# Altium PCB motor_board.PcbDoc
Units mm, origin at the board's own origin, x right, y up, seen from the top; angles counter-clockwise.
Board outline 50 x 50 mm, 4 copper layers (TOP, GND1, GND2, BOTTOM), stack 0.603 mm thick; 61 components, 21 nets, 117 pads, 255 vias.
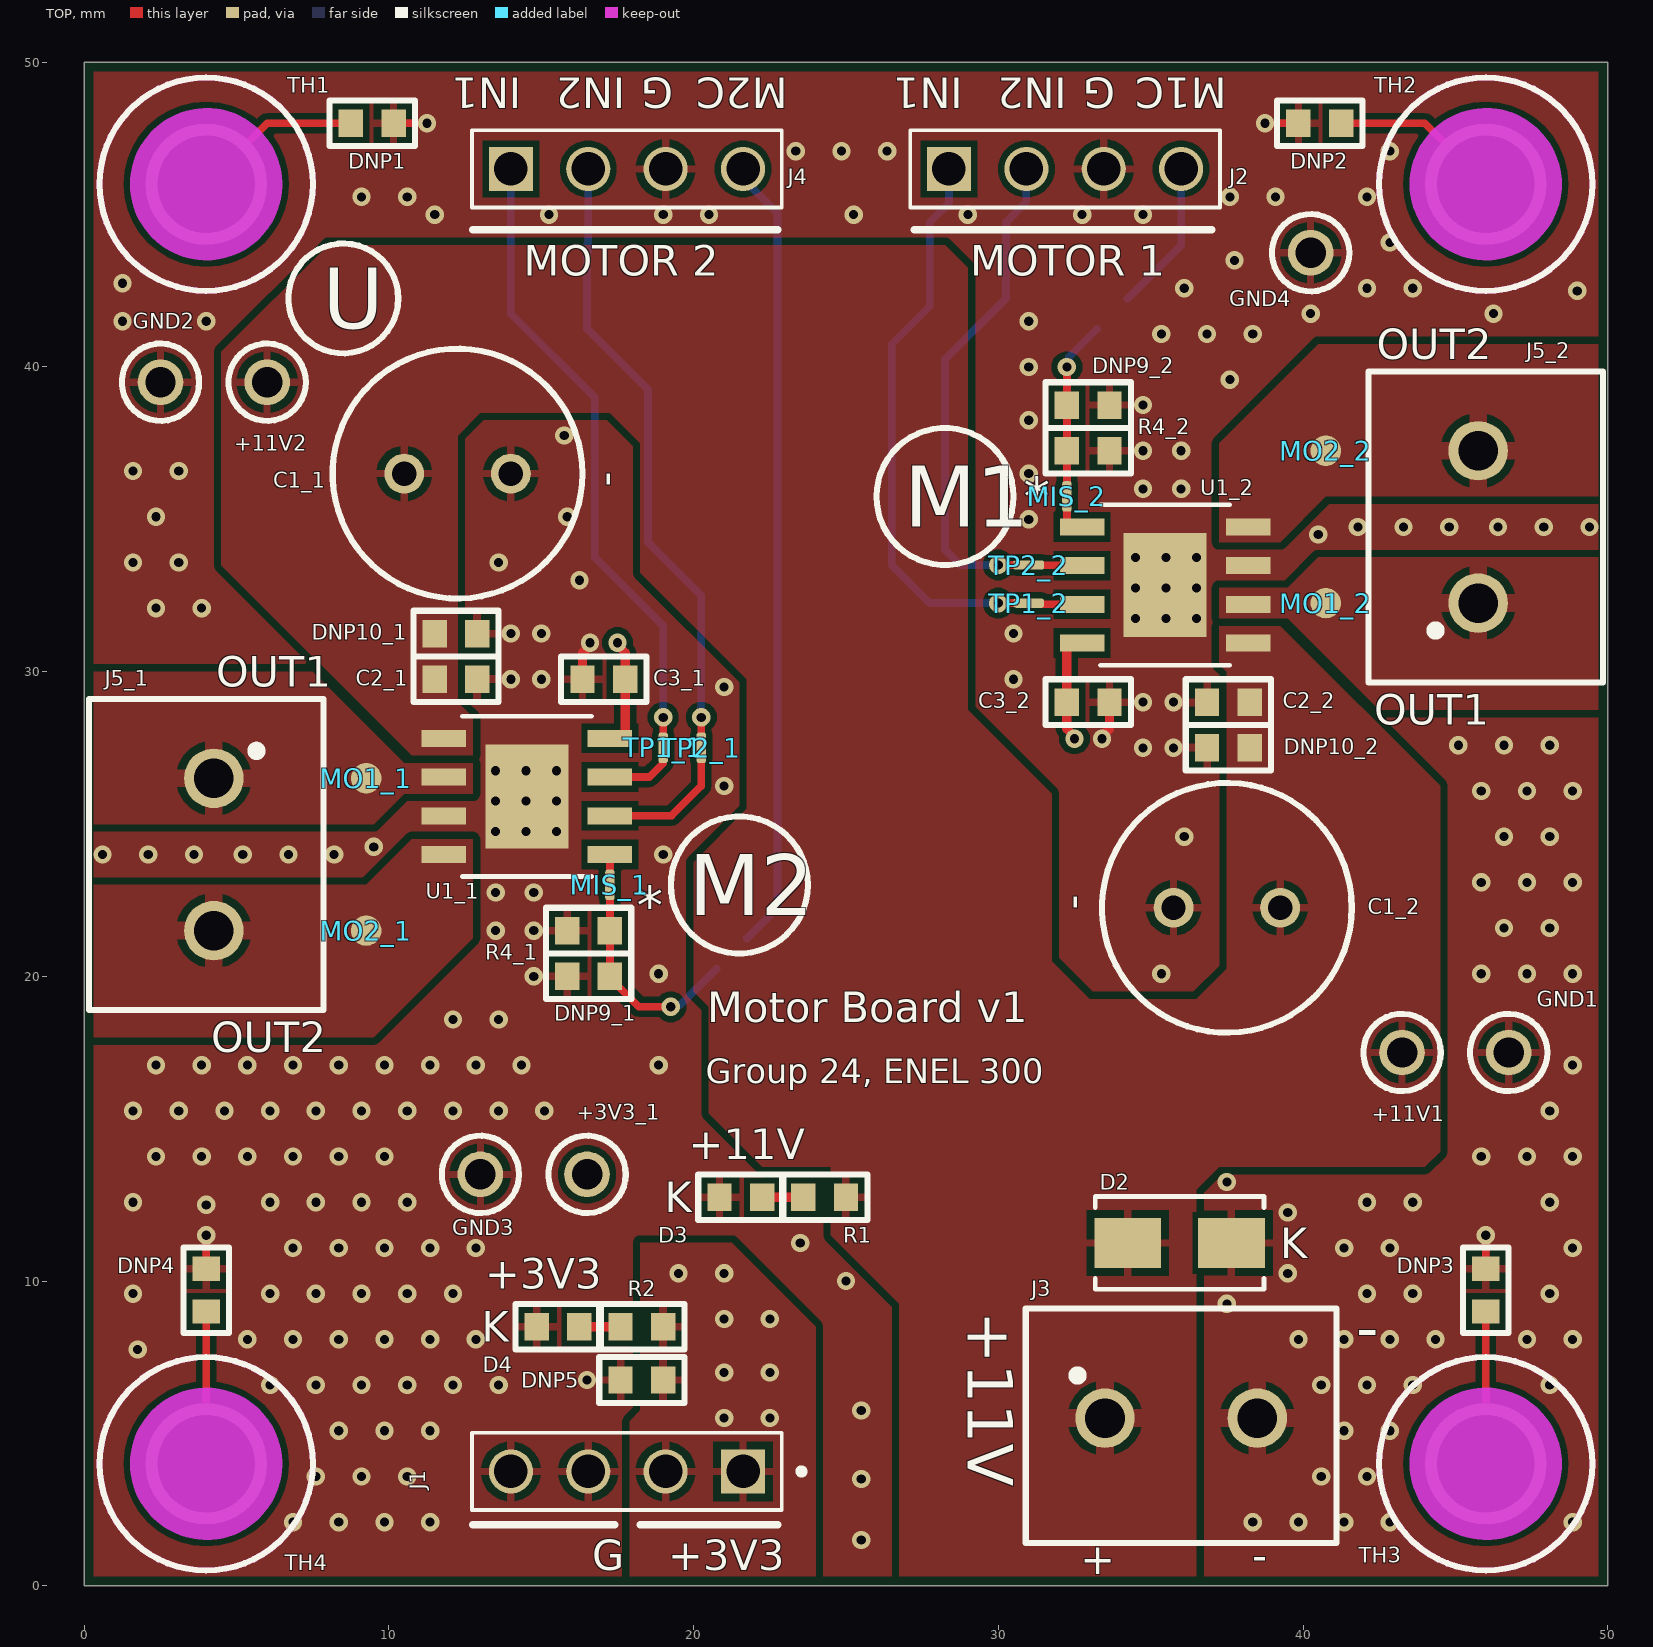
[diagram p0: TOP view]
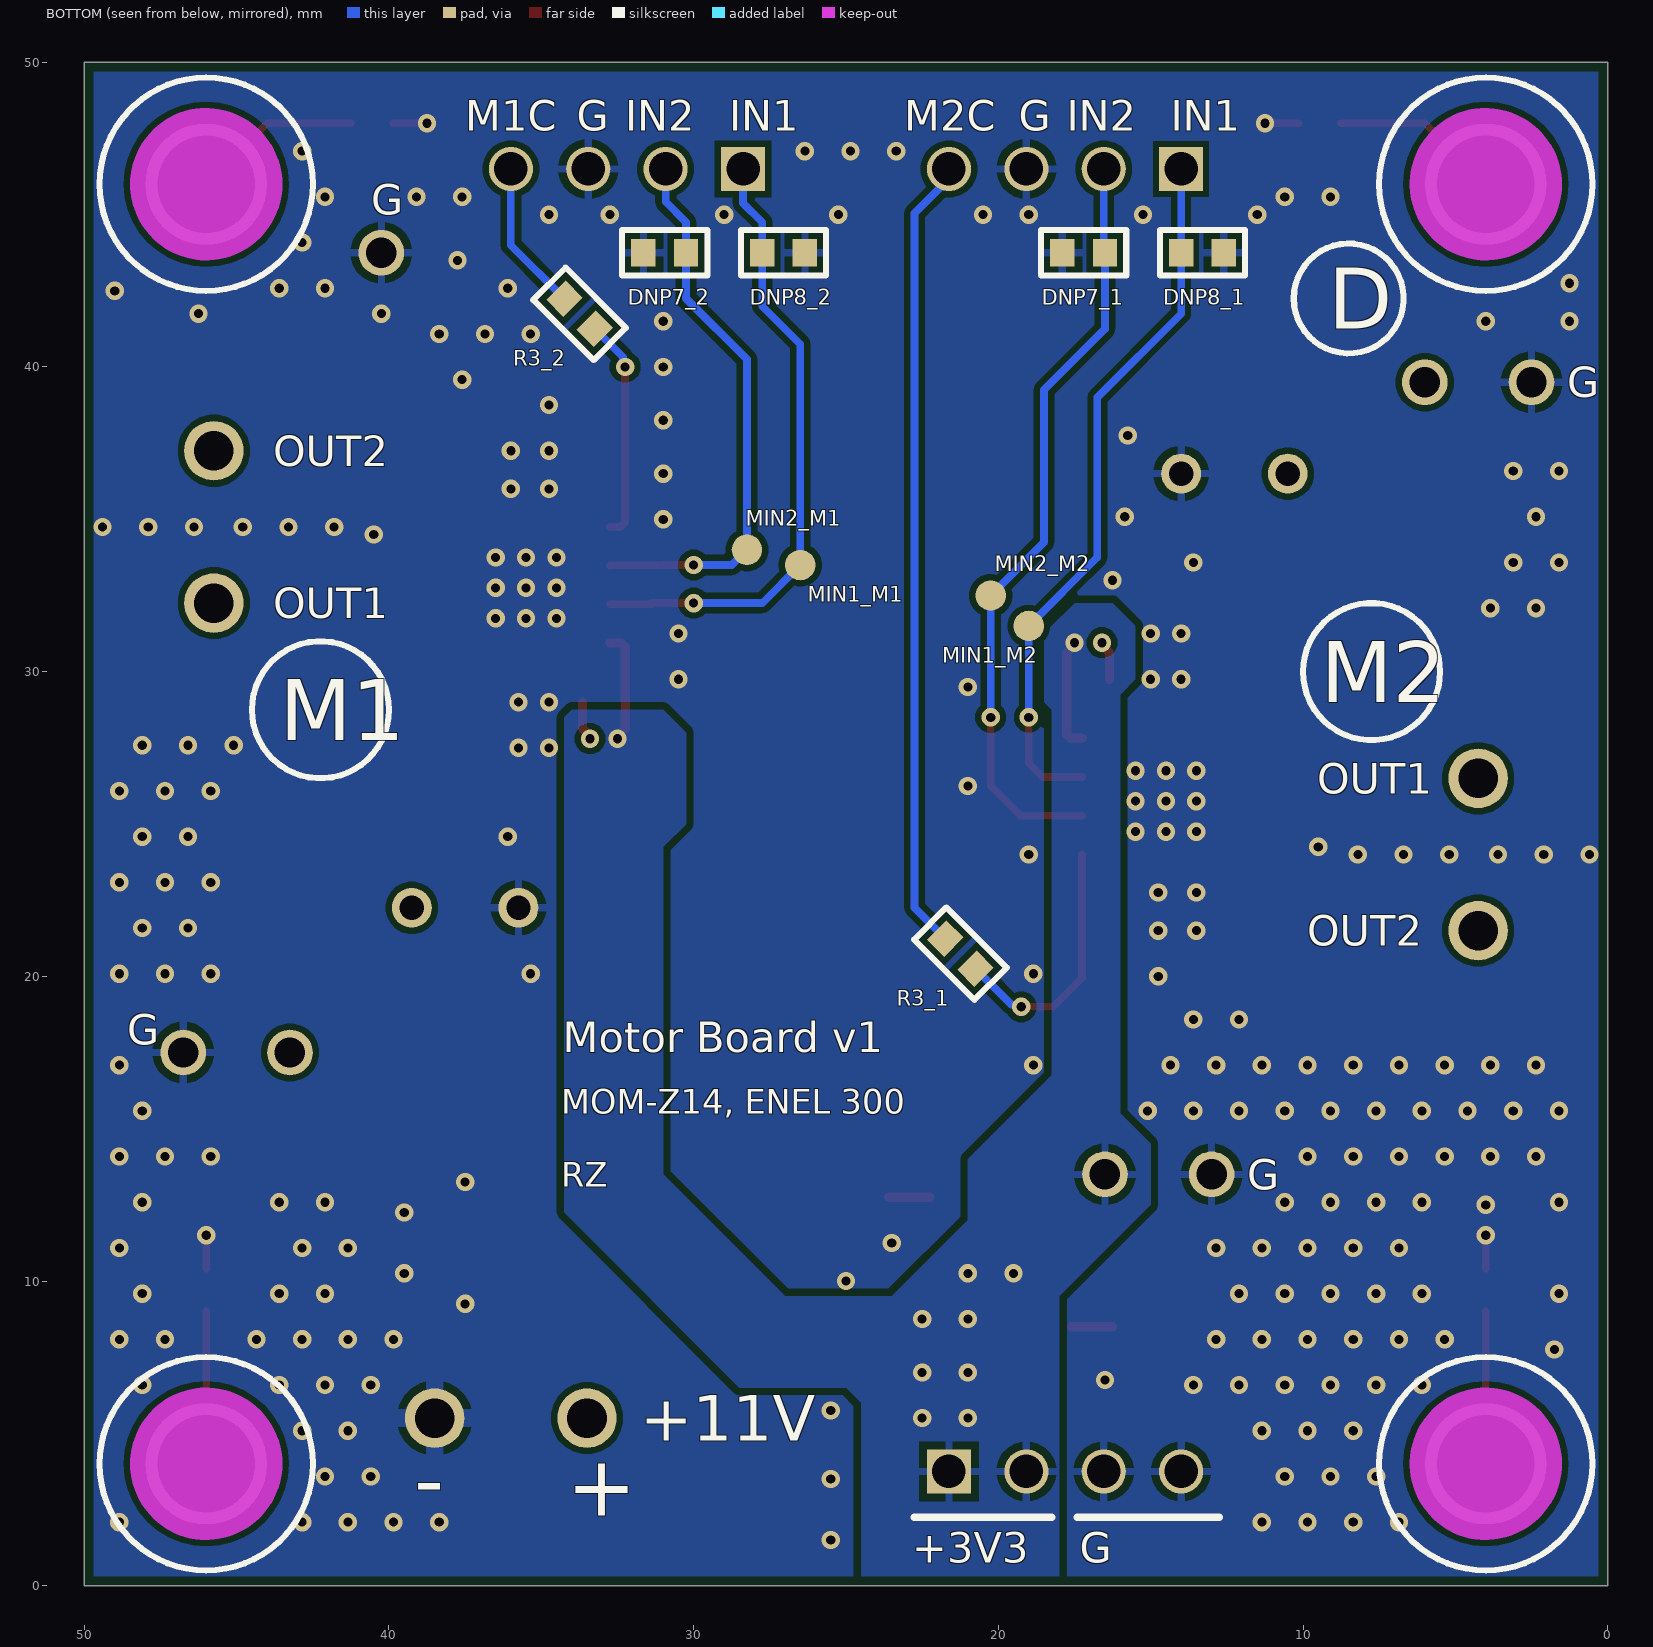
[diagram p1: BOTTOM view, seen from below]
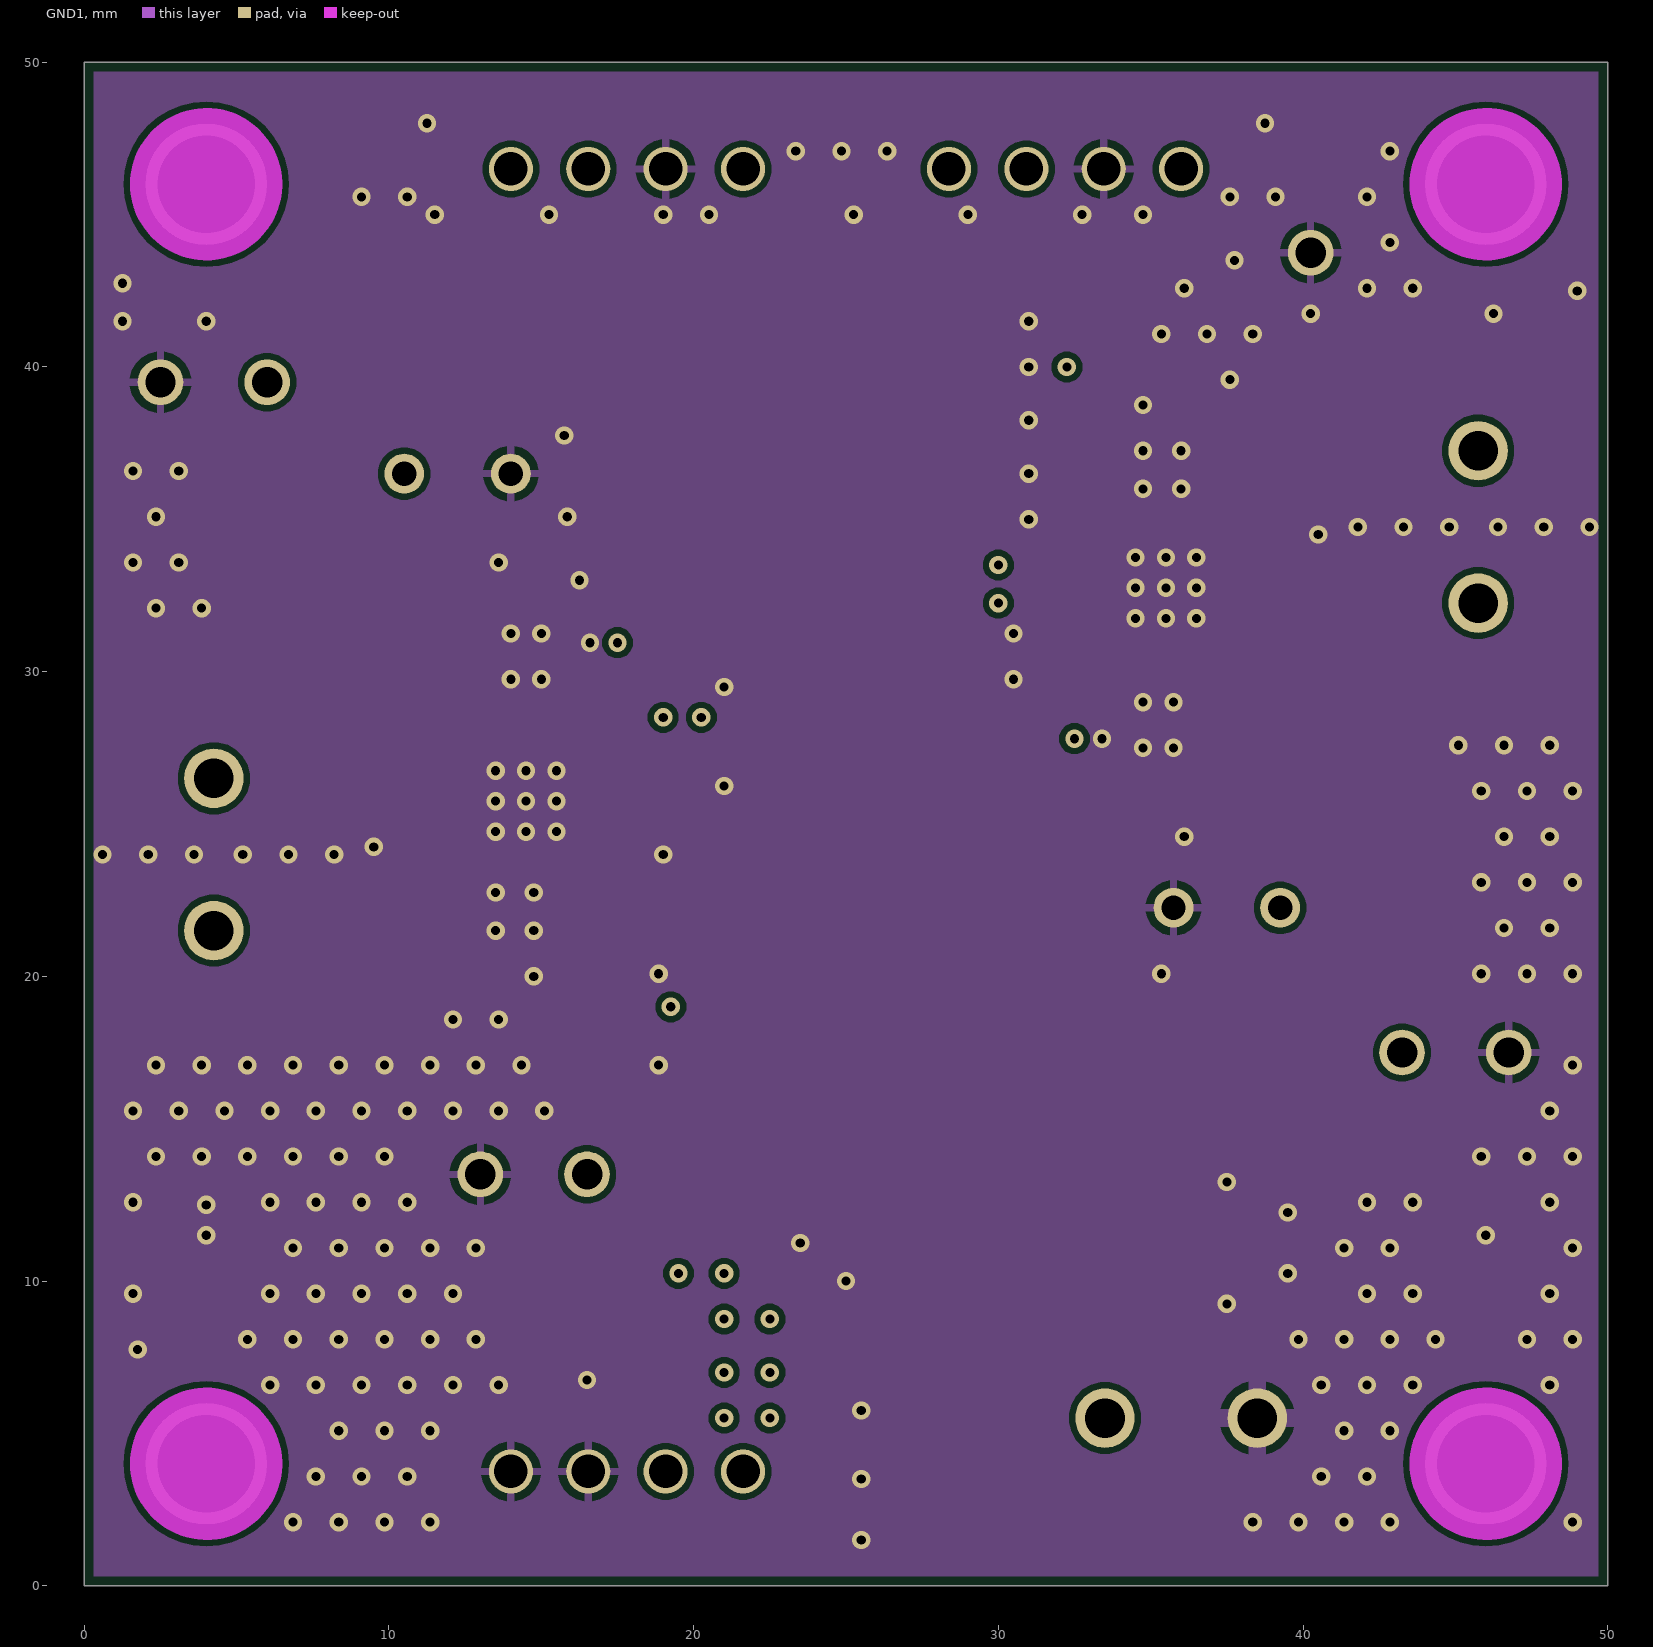
[diagram p2: GND1]
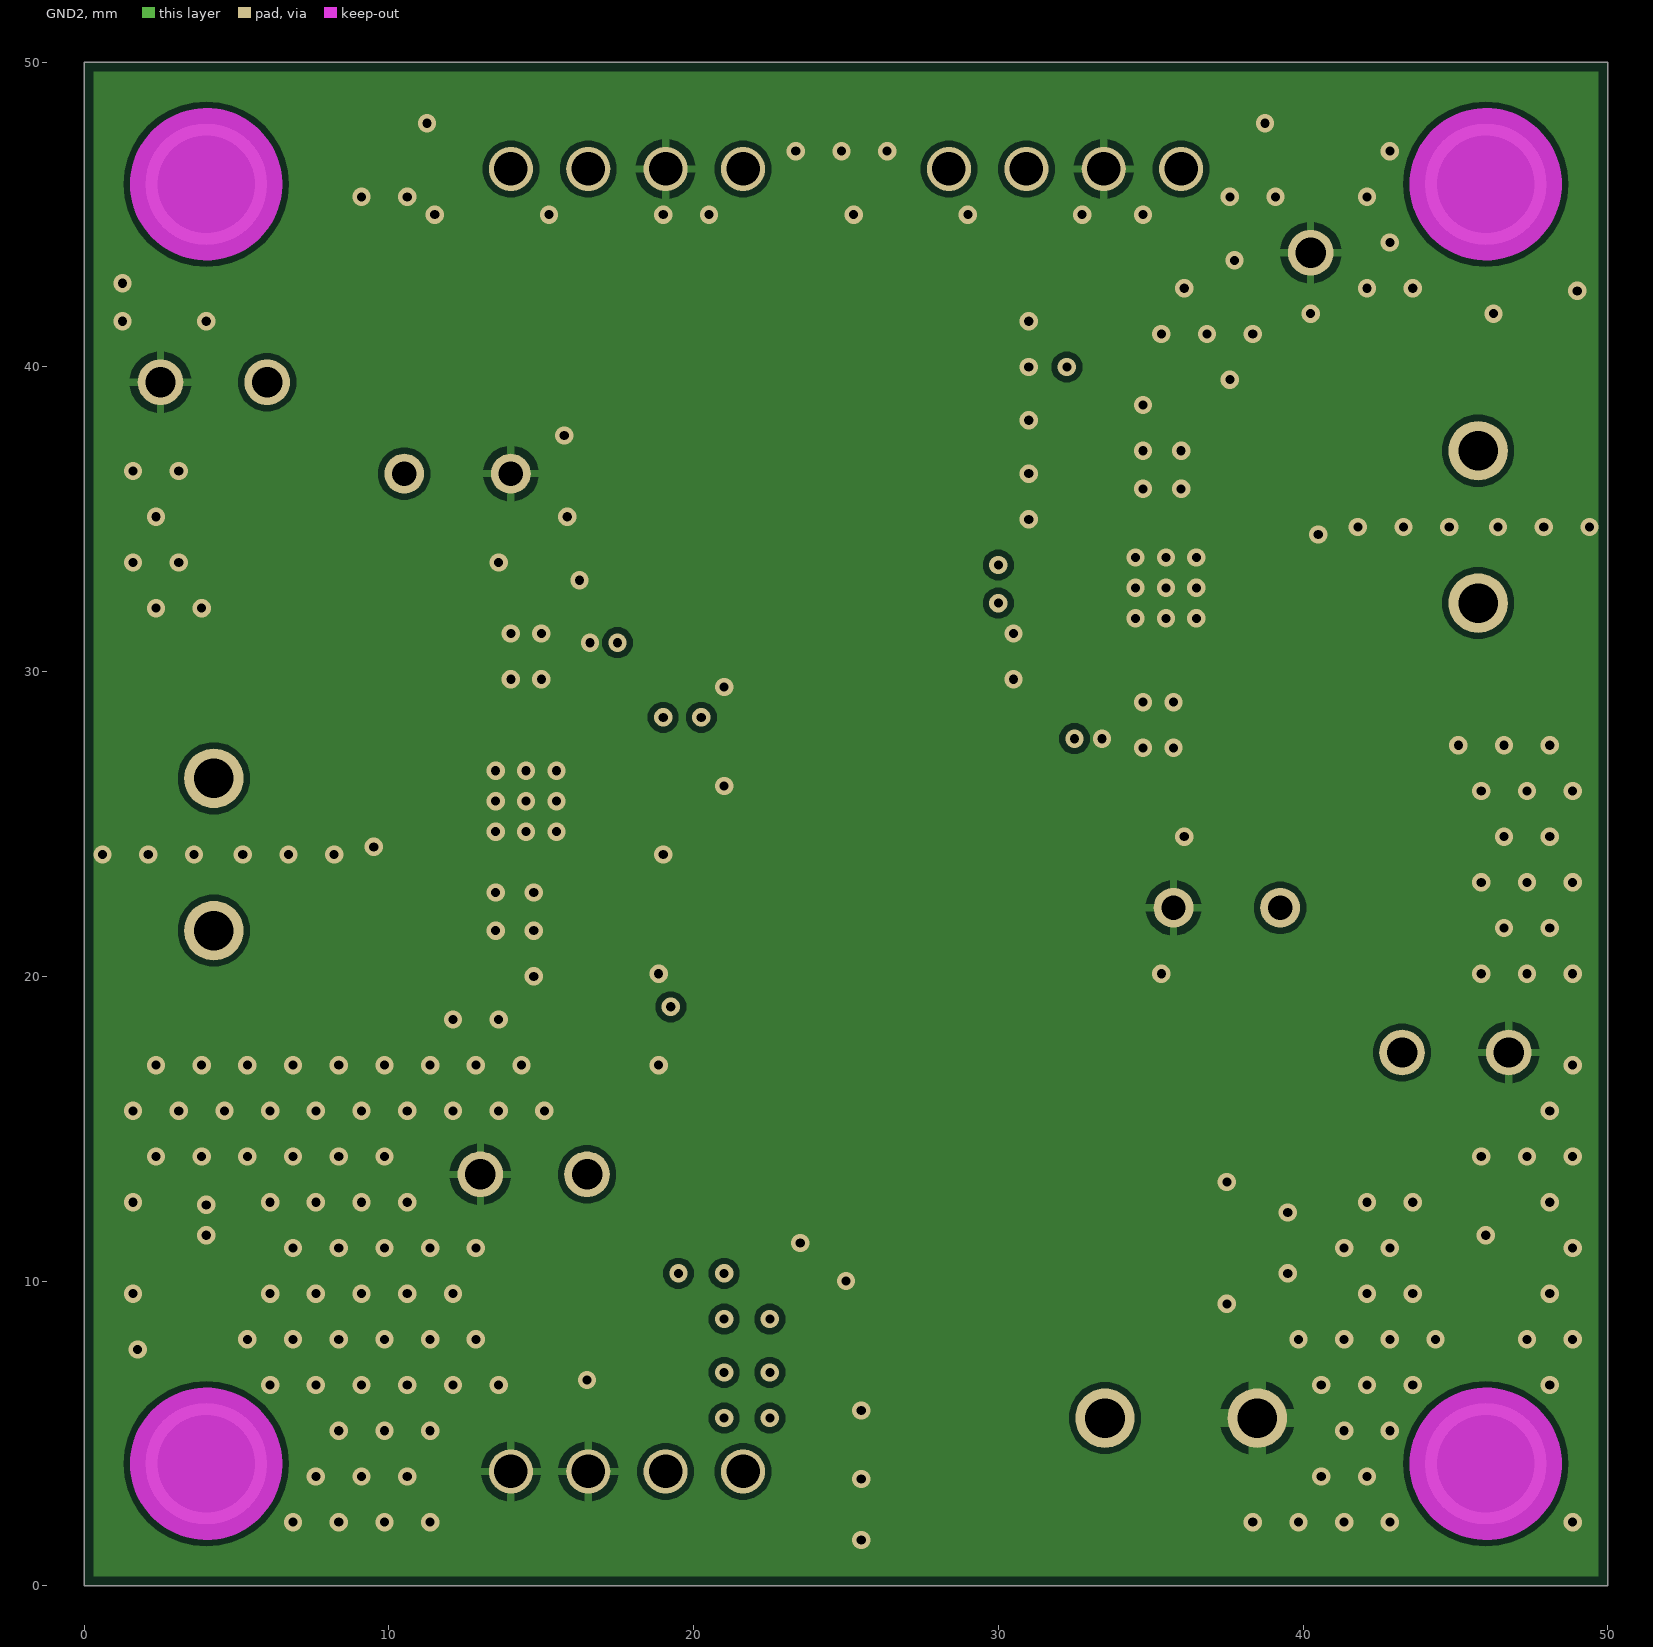
[diagram p3: GND2]
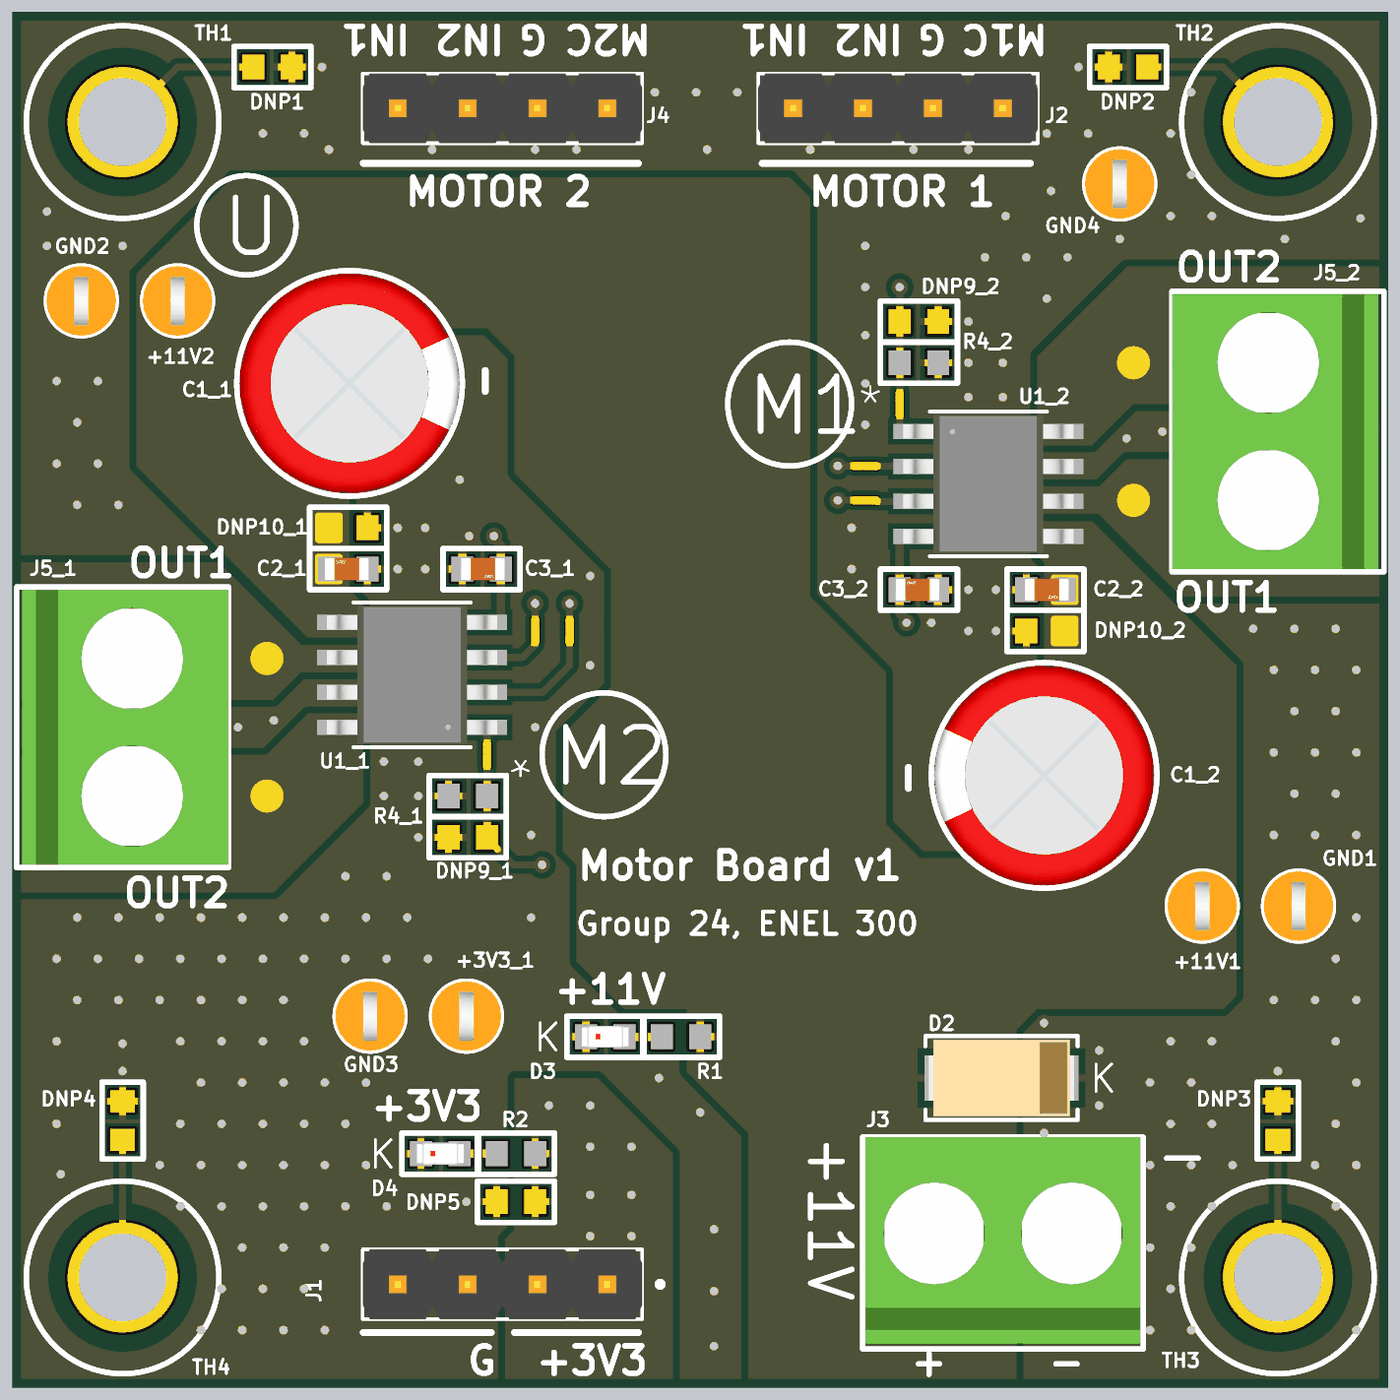
[diagram p4: 3D render of the assembled board from above, using the file's embedded part models]

## Layer stack, top to bottom
Top Solder: solder mask 0.0102, Solder Resist, Dk 3.5
TOP: signal copper 0.0356
Dielectric 2: prepreg 0.0711, PP-006, Dk 4.1
GND1: signal copper 0.035
Dielectric 1: dielectric 0.32, FR-4, Dk 4.8
GND2: signal copper 0.035
Dielectric 3: prepreg 0.0711, PP-006, Dk 4.1
BOTTOM: signal copper 0.0356
Bottom Solder: solder mask 0.0102, Solder Resist, Dk 3.5

## Board outline
0,0 50,0 50,50 0,50

## Design rules (kind name [scope] priority, off if disabled: settings)
AcuteAngle [All] p1: minimum=6.00000000000000E+0001 checktracksonly=TRUE
BoardOutlineClearance "JLC PCB Clearance" [All] p1: gap=0.3 ignorepadtopadclearanceinfootprint=FALSE
Clearance Clearance_1 [All] p1: gap=0.2 ignorepadtopadclearanceinfootprint=TRUE except(0.25: Fill-Fill Fill-Poly Fill-Region Poly-Poly Poly-Region Region-Region)
ComponentClearance [All] p1: gap=0 collisioncheckmode=3 verticalgap=0.254 showdistances=FALSE
DiffPairsRouting [All] p1: maxlimit=0.254 minlimit=0.152 mostfreqgap=0.254 toplayer_maxgap=0.152 toplayer_prefgap=0.152 toplayer_minwidth=0.089 toplayer_maxwidth=0.381 toplayer_prefwidth=0.122 midlayer1_mingap=0.254 midlayer1_minwidth=0.381 midlayer1_maxwidth=0.381 midlayer1_prefwidth=0.381 midlayer2_mingap=0.254 midlayer2_minwidth=0.381 midlayer2_maxwidth=0.381 midlayer2_prefwidth=0.381 bottomlayer_maxgap=0.152 bottomlayer_prefgap=0.152 bottomlayer_minwidth=0.089 bottomlayer_maxwidth=0.381 bottomlayer_prefwidth=0.122 maxuncoupledlength=12.7
HoleSize [All] p1: absolutevalues=TRUE maxlimit=6.3 minlimit=0.025 maxpercent=80.000 minpercent=20.000
HoleToHoleClearance [All] p1: gap=0.3 allowstackedmicrovias=FALSE
MinimumAnnularRing [All] p1: minimumring=0.15
MinimumSolderMaskSliver [All] p1: minsoldermaskwidth=0.038
PlaneConnect [All] p1: planeconnectstyle=Direct reliefexpansion=0.508 reliefentries=4 reliefconductorwidth=0.254 reliefairgap=0.254
PolygonConnect "Connector Large Thermal Relief" [InComponent('J5_1', 'J5_2', 'J3')] p1: thpad.connectstyle=Relief thpad.reliefconductorwidth=0.6 thpad.reliefentries=4 thpad.polygonreliefangle="90 Angle" thpad.airgapwidth=0.254 smdpad.connectstyle=Relief smdpad.reliefconductorwidth=0.254 smdpad.reliefentries=4 smdpad.polygonreliefangle="90 Angle" smdpad.airgapwidth=0.254 via.connectstyle=Relief via.reliefconductorwidth=0.254 via.reliefentries=4 via.polygonreliefangle="90 Angle" via.airgapwidth=0.254
PolygonConnect "No Thermal Relief General Power" [InComponent('U1_1', 'U1_2', 'DNP10_1', 'DNP10_2', 'C2_1', 'C2_2') vs InNet('+11V')] p2: connectstyle=Direct reliefconductorwidth=0.254 reliefentries=4 polygonreliefangle="90 Angle" airgapwidth=0.254
PolygonConnect "No Thermal Relief GND" [InComponent('U1_1', 'U1_2') vs InNet('GND')] p3: connectstyle=Direct reliefconductorwidth=0.254 reliefentries=4 polygonreliefangle="90 Angle" airgapwidth=0.254
PolygonConnect "No Thermal Relief Motor" [InComponent('U1_1', 'U1_2','MO1_1','MO1_2','MO2_1','MO2_2') vs InNet('MOTOR_OUT_1_1') OR InNet('MOTOR_OUT_1_2') OR InNet('MOTOR_OUT_2_1') OR InNet('MOTOR_OUT_2_2')] p4: connectstyle=Direct reliefconductorwidth=0.3 reliefentries=4 polygonreliefangle="90 Angle" airgapwidth=0.254
PolygonConnect DEFAULT [All] p5: thpad.connectstyle=Relief thpad.reliefconductorwidth=0.254 thpad.reliefentries=4 thpad.polygonreliefangle="90 Angle" thpad.airgapwidth=0.254 smdpad.connectstyle=Relief smdpad.reliefconductorwidth=0.254 smdpad.reliefentries=4 smdpad.polygonreliefangle="90 Angle" smdpad.airgapwidth=0.254 via.connectstyle=Direct via.reliefconductorwidth=0.254 via.reliefentries=4 via.polygonreliefangle="90 Angle" via.airgapwidth=0.254
RoomDefinition U_motor_driver2 [InComponentClass('U_motor_driver2')] p1: confinementstyle=ConfineIn formatcopy=TRUE lockcomponents=FALSE outline 0,17.94 29.5,17.94 29.5,40.75 0,40.75
RoomDefinition U_motor_driver1 [InComponentClass('U_motor_driver1')] p2: confinementstyle=ConfineIn formatcopy=TRUE lockcomponents=FALSE outline 50,40.81 20.5,40.81 20.5,18 50,18
RoutingVias [All] p1: holewidth=0.25 width=0.5 viastyle="Through Hole" minholewidth=0.2 minwidth=0.4 maxholewidth=0.4 maxwidth=1
SilkToSilkClearance [All] p1 off: silktosilkclearance=0
SilkToSolderMaskClearance [IsPad] p1: minsilkscreentomaskgap=0.15 clearancetoexposedcopper=TRUE
SolderMaskExpansion SolderMaskExpansion_PAD [InPadClass('All Pads')] p1: expansion=0.051 istentingtop=FALSE
SolderMaskExpansion SolderMaskExpansion_VIA [IsVia] p2: expansion=0.102 istentingtop=TRUE
SolderMaskExpansion [All] p3: expansion=0.102 istentingtop=FALSE
SupplyNets "Schematic Supply Nets_3" [InNet('+3V3')] p1: voltage=0.000
SupplyNets "Schematic Supply Nets_2" [InNet('+11V')] p2: voltage=0.000
SupplyNets "Schematic Supply Nets_8" [InNet('GND')] p3: voltage=0.000
Width [All] p1: maxlimit=5 minlimit=0.1 preferedwidth=0.254
22 further rules are at their usual default settings.

## Classes and differential pairs
channel class motor_driver: U_motor_driver1 U_motor_driver2
component class U_motor_driver2: C1_2 C2_2 C3_2 DNP7_2 DNP8_2 DNP9_2 DNP10_2 J5_2 MIN1_M2 MIN2_M1 MIS_2 MO1_2 MO2_2 R3_2 R4_2 TP1_2 TP2_2 U1_2
component class U_motor_driver1: C1_1 C2_1 C3_1 DNP7_1 DNP8_1 DNP9_1 DNP10_1 J5_1 MIN1_M2 MIN2_M2 MIS_1 MO1_1 MO2_1 R3_1 R4_1 TP1_1 TP2_1 U1_1
component class top_level: +3V3_1 +11V1 +11V2 D2 D3 D4 DNP1 DNP2 DNP3 DNP4 DNP5 GND1 GND2 GND3 GND4 J1 J2 J3 J4 R1 R2 TH1 TH2 TH3 TH4

## Components (designator, comment, footprint, x,y, rotation, side; value= is the part's Value field where it differs from the comment)
+3V3_1 "TP - 5008 (Compact)" "5008 - Keystone Compact Footprint" 16.5,13.5 r90 top
+11V1 "TP - 5008 (Compact)" "5008 - Keystone Compact Footprint" 43.25,17.5 r90 top
+11V2 "TP - 5008 (Compact)" "5008 - Keystone Compact Footprint" 6,39.5 r90 top
C1_1 "860020574012" "C - 860020574012" 12.25,36.5 r0 top value=220uF (schematic designator C1)
C1_2 "860020574012" "C - 860020574012" 37.5,22.25 r180 top value=220uF (schematic designator C1)
C2_1 "C - CAP CER 100nF 100V 10% 0603" CAP_0603 12.15,29.75 r180 top value=100nF (schematic designator C2)
C2_2 "C - CAP CER 100nF 100V 10% 0603" CAP_0603 37.6,29 r0 top value=100nF (schematic designator C2)
C3_1 "C - CAP CER 100nF 100V 10% 0603" CAP_0603 17.1,29.75 r0 top value=100nF (schematic designator C3)
C3_2 "C - CAP CER 100nF 100V 10% 0603" CAP_0603 32.9,29 r180 top value=100nF (schematic designator C3)
D2 "D - SMAJ15CA" "D - SMAJ15CA" 35.952,11.25 r180 top
D3 "D - LTST-C193KRKT-5A" "LED 0603" 21.55,12.75 r180 top
D4 "D - LTST-C193KRKT-5A" "LED 0603" 15.55,8.5 r180 top
DNP1 "DNP - DNP PAD 0603" "DNP 0603" 9.45,48 r0 top
DNP2 "DNP - DNP PAD 0603" "DNP 0603" 40.55,48 r180 top
DNP3 "DNP - DNP PAD 0603" "DNP 0603" 46,9.7 r90 top
DNP4 "DNP - DNP PAD 0603" "DNP 0603" 4,9.7 r90 top
DNP5 "DNP - DNP PAD 0603" "DNP 0603" 18.3,6.75 r0 top
DNP7_1 "DNP - DNP PAD 0603" "DNP 0603" 17.2,43.75 r180 bottom (schematic designator DNP7)
DNP7_2 "DNP - DNP PAD 0603" "DNP 0603" 30.95,43.75 r180 bottom (schematic designator DNP7)
DNP8_1 "DNP - DNP PAD 0603" "DNP 0603" 13.3,43.75 r0 bottom (schematic designator DNP8)
DNP8_2 "DNP - DNP PAD 0603" "DNP 0603" 27.05,43.75 r0 bottom (schematic designator DNP8)
DNP9_1 "DNP - DNP PAD 0603" "DNP 0603" 16.55,20 r0 top (schematic designator DNP9)
DNP9_2 "DNP - DNP PAD 0603" "DNP 0603" 32.95,38.75 r180 top (schematic designator DNP9)
DNP10_1 "DNP - DNP PAD 0603" "DNP 0603" 12.2,31.25 r180 top (schematic designator DNP10)
DNP10_2 "DNP - DNP PAD 0603" "DNP 0603" 37.55,27.5 r0 top (schematic designator DNP10)
GND1 "TP - 5008 (Compact)" "5008 - Keystone Compact Footprint" 46.75,17.5 r90 top
GND2 "TP - 5008 (Compact)" "5008 - Keystone Compact Footprint" 2.5,39.5 r90 top
GND3 "TP - 5008 (Compact)" "5008 - Keystone Compact Footprint" 13,13.5 r90 top
GND4 "TP - 5008 (Compact)" "5008 - Keystone Compact Footprint" 40.25,43.75 r90 top
J1 "Copy of SMTC-TSW-106-07-X-D_1" "J - 61300411121" 17.81,3.75 r180 top
J2 "Copy of SMTC-TSW-106-07-X-D_1" "J - 61300411121" 32.19,46.5 r0 top
J3 "J - 691137710002" "J - 691137710002" 36,5.5 r0 top
J4 "Copy of SMTC-TSW-106-07-X-D_1" "J - 61300411121" 17.81,46.5 r0 top
J5_1 "J - 691137710002" "J - 691137710002" 4.25,24 r270 top (schematic designator J5)
J5_2 "J - 691137710002" "J - 691137710002" 45.75,34.75 r90 top (schematic designator J5)
MIN1_M1 "TP - SMD Pad Test Point Circular" "TP - SMD Pad Testpoint" 26.5,33.5 r90 bottom (schematic designator MIN1)
MIN1_M2 "TP - SMD Pad Test Point Circular" "TP - SMD Pad Testpoint" 19,31.5 r90 bottom (schematic designator MIN1)
MIN2_M1 "TP - SMD Pad Test Point Circular" "TP - SMD Pad Testpoint" 28.25,34 r90 bottom (schematic designator MIN2)
MIN2_M2 "TP - SMD Pad Test Point Circular" "TP - SMD Pad Testpoint" 20.25,32.5 r90 bottom (schematic designator MIN2)
MIS_1 "SMD Pad Testpoint Rectangular (Signal)" "SMD Pad Testpoint Rectangular (Signal)" 17.25,23 r270 top (schematic designator MIS)
MIS_2 "SMD Pad Testpoint Rectangular (Signal)" "SMD Pad Testpoint Rectangular (Signal)" 32.25,35.75 r90 top (schematic designator MIS)
MO1_1 "TP - SMD Pad Test Point Circular" "TP - SMD Pad Testpoint" 9.25,26.5 r270 top (schematic designator MO1)
MO1_2 "TP - SMD Pad Test Point Circular" "TP - SMD Pad Testpoint" 40.75,32.25 r90 top (schematic designator MO1)
MO2_1 "TP - SMD Pad Test Point Circular" "TP - SMD Pad Testpoint" 9.25,21.5 r270 top (schematic designator MO2)
MO2_2 "TP - SMD Pad Test Point Circular" "TP - SMD Pad Testpoint" 40.75,37.25 r90 top (schematic designator MO2)
R1 "ERJ-PB3B1001V" "RES 0603" 24.3,12.75 r0 top value=1k
R2 "R - RES 220R 0.33W 1% 0603" "RES 0603" 18.3,8.5 r0 top value=220
R3_1 "R - RES 0R 0.1W N/A% 0603" "RES 0603" 21.245,20.745 r225 bottom value=0 (schematic designator R3)
R3_2 "R - RES 0R 0.1W N/A% 0603" "RES 0603" 33.745,41.745 r225 bottom value=0 (schematic designator R3)
R4_1 "R - RES 620R 0.33W 1% 0603" "RES 0603" 16.55,21.5 r0 top value=620 (schematic designator R4)
R4_2 "R - RES 620R 0.33W 1% 0603" "RES 0603" 32.95,37.25 r180 top value=620 (schematic designator R4)
TH1 "TH - M3 Mounting Hole" "M3 Mounting" 4,46 r0 top locked
TH2 "TH - M3 Mounting Hole" "M3 Mounting" 46,46 r0 top locked
TH3 "TH - M3 Mounting Hole" "M3 Mounting" 46,4 r0 top locked
TH4 "TH - M3 Mounting Hole" "M3 Mounting" 4,4 r0 top locked
TP1_1 "SMD Pad Testpoint Rectangular (Signal)" "SMD Pad Testpoint Rectangular (Signal)" 19,27.5 r90 top (schematic designator TP1)
TP1_2 "SMD Pad Testpoint Rectangular (Signal)" "SMD Pad Testpoint Rectangular (Signal)" 31,32.25 r180 top (schematic designator TP1)
TP2_1 "SMD Pad Testpoint Rectangular (Signal)" "SMD Pad Testpoint Rectangular (Signal)" 20.25,27.5 r90 top (schematic designator TP2)
TP2_2 "SMD Pad Testpoint Rectangular (Signal)" "SMD Pad Testpoint Rectangular (Signal)" 31,33.5 r180 top (schematic designator TP2)
U1_1 "DRV8251ADDAR" "U - DRV8251ADDAR" 14.526,25.905 r180 top (schematic designator U1)
U1_2 "DRV8251ADDAR" "U - DRV8251ADDAR" 35.474,32.845 r0 top (schematic designator U1)

## Footprints (in the part's own frame and the unit in brackets; to place one, negate y for a bottom-side part, rotate by r counter-clockwise, add the part's x,y. Pads: shape width x height; smd on the part's side, far side on the other; paste and mask are expansions set on the pad)
"5008 - Keystone Compact Footprint" [mm]
  round 1.5 hole 1: 1(0,0)
  silkscreen extent -1.27,-1.27 1.27,1.27, body extent -1.27,-1.27 1.27,1.27, height 4.57
"C - 860020574012" [mm] "860020574012"
  round 1.308 hole 0.8: 1(-1.75,0) 2(1.75,0)
  silkscreen extent -4.1,-4.1 4.1,4.1, body extent -3.99,-3.98 3.99,4, height 11.39
CAP_0603 [mm]
  rect 0.8x0.9 smd: 1(-0.75,0) 2(0.65,0)
  silkscreen extent -1.45,-0.75 1.35,0.75, body extent -1.48,-0.73 1.48,0.73, height 0.25
"D - SMAJ15CA" [mil] "SMAJ15CA"
  rect 86x65 smd paste+0 mask+0: 1(-67,0) 2(67,0)
  silkscreen extent -109,-60 109,60, body extent -104,-55 104,55, height 92
"DNP 0603" [mm]
  rect 0.8x0.9 smd paste-2539.97: 1(-0.7,0) 2(0.7,0)
  silkscreen extent -1.4,-0.75 1.4,0.75
"J - 61300411121" [mm]
  rect 1.45x1.45 / inner round 1.45 / far side rect 1.45x1.45 hole 1.1: 1(-3.81,0)
  round 1.45 hole 1.1: 2(-1.27,0) 3(1.27,0) 4(3.81,0)
  silkscreen extent -5.83,-1.27 5.08,1.27, body extent -5.08,-1.27 5.08,1.27, height 7.27
"J - 691137710002" [mm]
  round 1.95 hole 1.3: 1(-2.5,0) 2(2.5,0)
  silkscreen extent -5.1,-4.1 5.1,3.6, body extent -5,-3.9 5,3.6, height 11.5
"LED 0603" [mm]
  rect 0.8x0.9 smd: 1(-0.7,0) 2(0.7,0)
  silkscreen extent -1.4,-0.75 1.4,0.75, body extent -1.25,-0.55 1.25,0.55, height 0.25
"M3 Mounting" [mm]
  round 4 hole 3.2: 1(0,0)
  TOP keep-out circle w0.2: c0,0 r3.5
  silkscreen extent -3.5,-3.5 3.5,3.5
"RES 0603" [mm]
  rect 0.8x0.9 smd: 1(-0.7,0) 2(0.7,0)
  silkscreen extent -1.4,-0.75 1.4,0.75, body extent -0.88,-0.48 0.87,0.47, height 1.3
"SMD Pad Testpoint Rectangular (Signal)" [mm]
  rrect50% 1x0.305 smd paste-2539.97 mask+0.051: 1(0,0)
"TP - SMD Pad Testpoint" [mm]
  round 1 smd paste-2539.97: 1(0,0)
"U - DRV8251ADDAR" [mil]
  rect 57.5x22 smd paste+0 mask+0: 1(-107.25,75) 2(-107.25,25) 3(-107.25,-25) 4(-107.25,-75) 5(107.25,-75) 6(107.25,-25) 7(107.25,25) 8(107.25,75)
  rect 107x134 smd paste-66.5 mask+0: 9(0,0)
  silkscreen extent -84,-103 84,104, body extent -122,-99 122,99, height 67

## Part data
+3V3_1 +11V1 +11V2 GND1 GND2 GND3 GND4: "5008 - Orange PC Test Point, Compact Phosphor Bronze Silver Plating Through Hole Mounting Type"
C1_1 C1_2: library part "C - CAP ELC 220uF 35V 20% CAN", "860020574012 - 220 µF 35 V Aluminum Electrolytic Capacitors Radial, Can 2000 Hrs @ 105°C"
C2_1 C2_2 C3_1 C3_2: "GRM188R72A104KA35D - 0.1 µF ±10% 100V Ceramic Capacitor X7R 0603 (1608 Metric)"
D2: "SMAJ15CA - 24.4V Clamp 16.4A Ipp Tvs Diode Surface Mount DO-214AC (SMA)"
D3 D4: "LTST-C193KRKT-5A - Red 631nm LED Indication - Discrete 2V 0603 (1608 Metric)"
J1 J2 J4: library part "J - 61300411121", "61300411121 - Connector Header Through Hole 4 position 0.100\" (2.54mm)"
J3 J5_1 J5_2: "691137710002 - 2 Position Wire to Board Terminal Block Horizontal with Board 0.197\" (5.00mm) Through Hole"
MIN1_M1 MIN1_M2 MIN2_M1 MIN2_M2 MO1_1 MO1_2 MO2_1 MO2_2: "Pad Test Point, Circular, 1mm Diameter."
MIS_1 MIS_2 TP1_1 TP1_2 TP2_1 TP2_2: "SMD Pad Test Point, No Stencil, Rectangular, 1mm Long, 0.3 (12mil) Wide, For Signal Traces."
R1: library part "R - RES 1kR 0.2W 0.1% 0603", "ERJ-PB3B1001V - 1 kOhms ±0.1% 0.2W, 1/5W Chip Resistor 0603 (1608 Metric) Automotive AEC-Q200 Thick Film"
R2: "ERJ-PA3F2200V - 220 Ohms ±1% 0.333W, 1/3W Chip Resistor 0603 (1608 Metric) Automotive AEC-Q200, Pulse Withstanding Thick Film"
R3_1 R3_2: "ERJ-3GEY0R00V - 0 Ohms Jumper Chip Resistor 0603 (1608 Metric) Automotive AEC-Q200 Thick Film"
R4_1 R4_2: "ERJ-PA3F6200V - 620 Ohms ±1% 0.333W, 1/3W Chip Resistor 0603 (1608 Metric) Automotive AEC-Q200, Pulse Withstanding Thick Film"
U1_1 U1_2: library part "U - DRV8251ADDAR", "DRV8251ADDAR - 50-V, 4.1-A H-bridge motor driver with integrated current regulation & current-sense feedback 8-SO PowerPAD -40 to 150"

## Via types
v1: diameter 0.6, hole 0.3, TOP to BOTTOM, tented both sides, 255 vias

## Nets (pads, with @x,y where several pads share a name; then routed paths per layer and width w, separated by ;. In a path a pad name is that pad's centre, name@x,y a point inside that pad or via, vN(x,y) a via of type N, cw(c..) or ccw(c..) an arc to the next point about the centre after c; other vN are vias at no path point)
+3V3: +3V3_1.1 C3_1.2 C3_2.2 DNP5.2 J1.1 J1.2 R2.2 U1_1.4 U1_2.4 | length 7.3
  TOP w0.305: U1_1.4 17.623,27.81 17.75,27.937 17.75,30.62 17.5,30.87 v1(17.5,30.95) ; v1(32.5,27.8) 32.5,27.88 32.25,28.13 32.25,30.813 32.377,30.94 U1_2.4
  other v1: 21,5.5 22.5,5.5 21,7 22.5,7 21,8.75 22.5,8.75 19.5,10.25 21,10.25
+11V: +11V1.1 +11V2.1 C1_1.1 C1_2.1 C2_1.2 C2_2.2 D2.2 DNP10_1.2 DNP10_2.2 J3.1 R1.2 U1_1.5 U1_2.5
GND: C1_1.2 C1_2.2 C2_1.1 C2_2.1 C3_1.1 C3_2.1 D2.1 D3.2 D4.2 DNP1.2 DNP2.2 DNP3.2 DNP4.2 DNP5.1 DNP7_1.1 DNP7_2.1 DNP8_1.1 DNP8_2.1 DNP9_1.1 DNP9_2.1 DNP10_1.1 DNP10_2.1 GND1.1 GND2.1 GND3.1 GND4.1 J1.3 J1.4 J2.3 J3.2 J4.3 R4_1.1 R4_2.1 U1_1.7 U1_1.9 U1_2.7 U1_2.9 | length 7
  TOP w0.254: DNP4.2 v1(4,11.5) ; DNP1.2 v1(11.25,48) ; v1(38.75,48) DNP2.2 ; DNP3.2 v1(46,11.5)
  TOP w0.305: C3_1.1 16.35,30.62 16.6,30.87 v1(16.6,30.95) ; v1(33.4,27.8) 33.4,27.88 33.65,28.13 C3_2.1
  other v1: 25.5,1.5 6.85,2.084 8.35,2.084 9.85,2.084 11.35,2.084 38.35,2.084 39.85,2.084 41.35,2.084 42.85,2.084 48.85,2.084 25.5,3.5 7.6,3.584 9.1,3.584 10.6,3.584 40.6,3.584 42.1,3.584 8.35,5.084 9.85,5.084 11.35,5.084 41.35,5.084 42.85,5.084 25.5,5.75 6.1,6.584 7.6,6.584 9.1,6.584 10.6,6.584 12.1,6.584 13.6,6.584 40.6,6.584 42.1,6.584 43.6,6.584 48.1,6.584 16.5,6.75 1.75,7.75 5.35,8.084 6.85,8.084 8.35,8.084 9.85,8.084 11.35,8.084 12.85,8.084 39.85,8.084 41.35,8.084 42.85,8.084 44.35,8.084 47.35,8.084 48.85,8.084 37.5,9.25 1.6,9.584 6.1,9.584 7.6,9.584 9.1,9.584 10.6,9.584 12.1,9.584 42.1,9.584 43.6,9.584 48.1,9.584 25,10 39.5,10.25 6.85,11.084 8.35,11.084 9.85,11.084 11.35,11.084 12.85,11.084 41.35,11.084 42.85,11.084 48.85,11.084 23.5,11.25 39.5,12.25 4,12.5 1.6,12.584 6.1,12.584 7.6,12.584 9.1,12.584 10.6,12.584 42.1,12.584 43.6,12.584 48.1,12.584 37.5,13.25 2.35,14.084 3.85,14.084 5.35,14.084 6.85,14.084 8.35,14.084 9.85,14.084 45.85,14.084 47.35,14.084 48.85,14.084 1.6,15.584 3.1,15.584 4.6,15.584 6.1,15.584 7.6,15.584 9.1,15.584 10.6,15.584 12.1,15.584 13.6,15.584 15.1,15.584 48.1,15.584 2.35,17.084 3.85,17.084 5.35,17.084 6.85,17.084 8.35,17.084 9.85,17.084 11.35,17.084 12.85,17.084 14.35,17.084 18.85,17.084 48.85,17.084 12.1,18.584 13.6,18.584 14.75,20 18.85,20.084 35.35,20.084 45.85,20.084 47.35,20.084 48.85,20.084 13.5,21.5 14.75,21.5 46.6,21.584 48.1,21.584 13.5,22.75 14.75,22.75 45.85,23.084 47.35,23.084 48.85,23.084 0.6,24 2.1,24 3.6,24 5.2,24 6.7,24 8.2,24 19,24 9.5,24.25 36.1,24.584 46.6,24.584 48.1,24.584 13.5,24.75 14.5,24.75 15.5,24.75 13.5,25.75 14.5,25.75 15.5,25.75 45.85,26.084 47.35,26.084 48.85,26.084 21,26.25 13.5,26.75 14.5,26.75 15.5,26.75 34.75,27.5 35.75,27.5 45.1,27.584 46.6,27.584 48.1,27.584 34.75,29 35.75,29 21,29.5 14,29.75 15,29.75 30.5,29.75 14,31.25 15,31.25 30.5,31.25 34.5,31.75 35.5,31.75 36.5,31.75 2.35,32.084 3.85,32.084 34.5,32.75 35.5,32.75 36.5,32.75 16.25,33 1.6,33.584 3.1,33.584 13.6,33.584 34.5,33.75 35.5,33.75 36.5,33.75 40.5,34.5 41.8,34.75 43.3,34.75 44.8,34.75 46.4,34.75 47.9,34.75 49.4,34.75 31,35 2.35,35.084 15.85,35.084 34.75,36 36,36 31,36.5 1.6,36.584 3.1,36.584 34.75,37.25 36,37.25 15.75,37.75 31,38.25 34.75,38.75 37.6,39.584 31,40 35.35,41.084 36.85,41.084 38.35,41.084 1.25,41.5 4,41.5 31,41.5 40.25,41.75 46.25,41.75 49,42.5 36.1,42.584 42.1,42.584 43.6,42.584 1.25,42.75 37.75,43.5 42.85,44.084 11.5,45 15.25,45 19,45 20.5,45 25.25,45 29,45 32.75,45 34.75,45 9.1,45.584 10.6,45.584 37.6,45.584 39.1,45.584 42.1,45.584 23.35,47.084 24.85,47.084 26.35,47.084 42.85,47.084
MD_CURRSEN_1: DNP9_1.2 MIS_1.1 R3_1.2 R4_1.2 U1_1.1 | length 8.5
  TOP w0.254: U1_1.1 17.25,19.95 18.2,19 v1(19.25,19)
  BOTTOM w0.254: v1(19.25,19) 19.316,19.066 19.566,19.066 R3_1.2
MD_CURRSEN_2: DNP9_2.2 MIS_2.1 R3_2.2 R4_2.2 U1_2.1 | length 7.3
  TOP w0.254: v1(32.25,40) DNP9_2.2 R4_2.2 MIS_2.1 32.25,34.902 32.402,34.75 U1_2.1
  BOTTOM w0.254: v1(32.25,40) 32.316,40.066 32.316,40.316 R3_2.2
MOTOR_1_CURRENT_SENSE_1: J2.4 R3_2.1 | length 5
  BOTTOM w0.254: R3_2.1 36,44 J2.4
MOTOR_1_PWM_IN_1_1: DNP8_2.2 J2.1 MIN1_M1.1 TP1_2.1 U1_2.3 | length 20.6
  TOP w0.254: v1(30,32.25) TP1_2.1 31.348,32.25 31.388,32.21 U1_2.3
  BOTTOM w0.254: J2.1 28.38,45.38 27.75,44.75 DNP8_2.2 27.75,42 26.5,40.75 MIN1_M1.1 27.75,32.25 v1(30,32.25)
MOTOR_1_PWM_IN_2_1: DNP7_2.2 J2.2 MIN2_M1.1 TP2_2.1 U1_2.2 | length 18.3
  TOP w0.254: v1(30,33.5) TP2_2.1 31.01,33.49 32.74,33.49 U1_2.2
  BOTTOM w0.254: v1(30,33.5) 28.75,33.5 MIN2_M1.1 28.25,40.25 30.25,42.25 DNP7_2.2 30.25,44.75 30.92,45.42 J2.2
MOTOR_2_CURRENT_SENSE_1: J4.4 R3_1.1 | length 26.1
  BOTTOM w0.254: J4.4 21.62,46.176 22.75,45.046 22.75,22.25 R3_1.1
MOTOR_2_PWM_IN_1_1: DNP8_1.2 J4.1 MIN1_M2.1 TP1_1.1 U1_1.3 | length 23.5
  TOP w0.254: U1_1.3 18.54,26.54 19,27 TP1_1.1 v1(19,28.5)
  BOTTOM w0.254: J4.1 DNP8_1.2 14,41.75 16.75,39 16.75,33.75 MIN1_M2.1 v1(19,28.5)
MOTOR_2_PWM_IN_2_1: DNP7_1.2 J4.2 MIN2_M2.1 TP2_1.1 U1_1.2 | length 25.2
  TOP w0.254: U1_1.2 19.27,25.27 20.25,26.25 TP2_1.1 v1(20.25,28.5)
  BOTTOM w0.254: DNP7_1.2 16.5,41.25 18.5,39.25 18.5,34.25 MIN2_M2.1 v1(20.25,28.5) ; DNP7_1.2@16.5,44 DNP7_1.2@16.54,44.04 ; DNP7_1.2@16.54,43.79 J4.2
MOTOR_OUT_1_1: J5_1.1 MO1_1.1 U1_1.6
MOTOR_OUT_1_2: J5_2.1 MO1_2.1 U1_2.6
MOTOR_OUT_2_1: J5_1.2 MO2_1.1 U1_1.8
MOTOR_OUT_2_2: J5_2.2 MO2_2.1 U1_2.8
NetD3_1: D3.1 R1.1 | length 1.4
  TOP w0.305: D3.1 R1.1
NetD4_1: D4.1 R2.1 | length 1.3
  TOP w0.305: D4.1 R2.1
NetDNP1_1: DNP1.1 TH1.1 | length 5.6
  TOP w0.254: TH1.1 6,48 DNP1.1
NetDNP2_1: DNP2.1 TH2.1 | length 5.6
  TOP w0.254: DNP2.1 44,48 TH2.1
NetDNP3_1: DNP3.1 TH3.1 | length 5
  TOP w0.254: TH3.1 DNP3.1
NetDNP4_1: DNP4.1 TH4.1 | length 5
  TOP w0.254: TH4.1 DNP4.1

## Polygon pours and split planes (outlines as drawn)
+11V on TOP "+11V_L01_P004" (solid, pour order 4): 24.5,11.5 24.5,13.75 22.25,13.75 22,14 20.5,15.5 20.5,19 20,19.5 20,23.75 21.75,25.5 21.75,29.75 18.25,33.25 18.25,37.5 17.25,38.5 13,38.5 12.25,37.75 12.25,29 12.75,28.5 12.75,27.25 10.75,27.25 4.5,33.5 4.5,40.5 8,44 28.25,44 29,43.25 29,28.75 31.75,26 31.75,20.5 33,19.25 36.5,19.25 37.5,20.25 37.5,30 37.25,30.25 37.25,31.5 39.25,31.5 44.5,26.25 44.5,14.25 44,13.75 37.25,13.75 36.5,13 36.5,0 26.75,0 26.75,9.25
GND on TOP "GND_L01_P008" (solid, pour order 8): 0,50 50,50 50,0 0,0
MOTOR_OUT_2_1 on TOP "MOTOR_OUT_2_1_L01_P002" (solid, remove dead copper, pour order 2): 12.75,21.25 9.5,18 0,18 0,23 9.25,23 10.75,24.5 12.75,24.5
MOTOR_OUT_1_1 on TOP "MOTOR_OUT_1_1_L01_P003" (solid, remove dead copper, pour order 3): 12.75,26 12.75,27 10.5,27 7.5,30 0,30 0,25 9.5,25 10.5,26
MOTOR_OUT_1_2 on TOP "MOTOR_OUT_1_2_L01_P001" (solid, remove dead copper, pour order 1): 37.25,32.75 37.25,31.75 39.5,31.75 42.5,28.75 50,28.75 50,33.75 40.5,33.75 39.5,32.75
MOTOR_OUT_2_2 on TOP "MOTOR_OUT_2_2_L01_P000" (solid, remove dead copper, pour order 0): 37.25,37.5 40.5,40.75 50,40.75 50,35.75 40.75,35.75 39.25,34.25 37.25,34.25
+3V3 on TOP "+3V3_L01_P007" (solid, pour order 7): 24,0 24,8.5 21.25,11.25 18.25,11.25 18.25,5.75 17.9,5.4 17.9,0
GND on GND1 "GND_L02_P009" (solid, pour order 9): 0,50 50,50 50,0 0,0
GND on GND2 "GND_L03_P010" (solid, pour order 10): 0,50 50,50 50,0 0,0
GND on BOTTOM "GND_L04_P011" (solid, pour order 11): 0,50 50,50 50,0 0,0
+3V3 on BOTTOM "+3V3_L04_P006" (solid, pour order 6): 18,9.5 15,12.5 15,14.5 16,15.5 16,29.25 15.5,29.75 15.5,31.5 16,32 16.25,32.25 17.5,32.25 18.5,31.25 18.5,29 18.25,28.75 18.25,16.75 21,14 21,12 23.5,9.5 27,9.5 31,13.5 31,24.25 30.25,25 30.25,28 31,28.75 34,28.75 34.25,28.5 34.25,12.25 28.5,6.5 25,6.5 24.5,6 24.5,0 22.5,0 18,0

## Keep-outs
Keep-Out Layer:
  circle w3: c4,4 r1
  circle w3: c46,4 r1
  circle w3: c46,46 r1
  circle w3: c4,46 r1

## Silkscreen, mask and mechanical layers (free items; w line width, h text height)
Top Overlay:
  circle w0.2: c28.25,35.75 r2.25
  circle w0.2: c21.5,23 r2.25
  circle w0.2: c8.5,42.25 r1.803
  lines w0.25: 12.75,2 17.4,2 ; 12.75,44.5 22.75,44.5 ; 18.25,2 22.75,2 ; 27.25,44.5 37,44.5
  text "IN1" at 14.333,49.5 h1 r180
  text "IN2" at 17.75,49.5 h1 r180
  text "G" at 19.333,49.5 h1 r180
  text "M2C" at 23.083,49.5 h1 r180
  text "IN1" at 28.833,49.5 h1 r180
  text "IN2" at 32.25,49.5 h1 r180
  text "G" at 33.833,49.5 h1 r180
  text "M1C" at 37.5,49.5 h1 r180
  text "MOTOR 2" at 14.418,43 h1
  text "MOTOR 1" at 29.084,43 h1
  text "U" at 7.834,41.25 h2
  text "OUT2" at 42.417,40.25 h1
  text "M1" at 26.917,34.75 h2
  text "OUT1" at 4.334,29.5 h1
  text "OUT1" at 42.334,28.25 h1
  text "M2" at 19.834,22 h2
  text "Motor Board v1" at 20.45,18.5 h1
  text "OUT2" at 4.167,17.5 h1
  text "Group 24, ENEL 300" at 20.4,16.483 h0.8
  text "+11V" at 19.834,14 h1
  text "+3V3" at 13.167,9.75 h1
  text "+11V" at 29,8.999 h1.5 r270
  text "-" at 41.75,7.75 h1.5
  text "+" at 33.833,1.25 h1 r180
  text "-" at 38.833,1.25 h1 r180
  text "G" at 16.667,0.5 h1
  text "+3V3" at 19.167,0.5 h1
Bottom Overlay:
  circle w0.2: c42.25,28.75 r2.25
  circle w0.2: c7.75,30 r2.25
  circle w0.2: c4,4 r3.5
  circle w0.2: c46,4 r3.5
  circle w0.2: c46,46 r3.5
  circle w0.2: c4,46 r3.5
  circle w0.2: c8.5,42.25 r1.803
  lines w0.25: 12.75,2.25 17.4,2.25 ; 18.25,2.25 22.75,2.25
  text "IN1" at 14.333,47.75 h1
  text "IN2" at 17.75,47.75 h1
  text "G" at 19.333,47.75 h1
  text "M2C" at 23.083,47.75 h1
  text "IN1" at 28.833,47.75 h1
  text "IN2" at 32.25,47.75 h1
  text "G" at 33.833,47.75 h1
  text "M1C" at 37.5,47.75 h1
  text "G" at 40.583,45 h1
  text "D" at 9.166,41.25 h2
  text "G" at 1.333,39 h1
  text "OUT2" at 43.8,36.75 h1
  text "OUT1" at 43.8,31.75 h1
  text "M2" at 9.416,29 h2
  text "M1" at 43.583,27.75 h2
  text "OUT1" at 9.532,26 h1
  text "OUT2" at 9.865,21 h1
  text "G" at 48.583,17.75 h1
  text "Motor Board v1" at 34.3,17.5 h1
  text "MOM-Z14, ENEL 300" at 34.35,15.483 h0.8
  text "RZ" at 34.35,13.1 h0.8
  text "G" at 11.833,13 h1
  text "+11V" at 31.749,4.75 h1.5
  text "+" at 34.166,4 h2 r180
  text "-" at 39.166,4 h2 r180
  text "G" at 17.333,0.75 h1
  text "+3V3" at 22.833,0.75 h1
Board Shape:
  the board outline again, w0.25

## Text inside footprints (layer, text, board x,y; h text height)
C1_1: Top Overlay "-" at 17.578,36.072 h1 r90; Mechanical 13 "-" at 17.578,36.072 h1 r90
C1_2: Top Overlay "-" at 32.172,22.678 h1 r270; Mechanical 13 "-" at 32.172,22.678 h1 r270
D2: Top Overlay "K" at 39.25,10.75 h1
D3: Top Overlay "K" at 19.048,12.25 h1
D4: Top Overlay "K" at 13.048,8 h1
U1_1: Top Overlay "*" at 19,23.5 h1.27 r180; Mechanical 13 "*" at 16.456,24.749 h1.27 r180
U1_2: Top Overlay "*" at 30.827,35.115 h1.27; Mechanical 13 "*" at 33.544,34.001 h1.27